# EAGLE board SilviaPID ver3.0 (EAGLE 6.0)
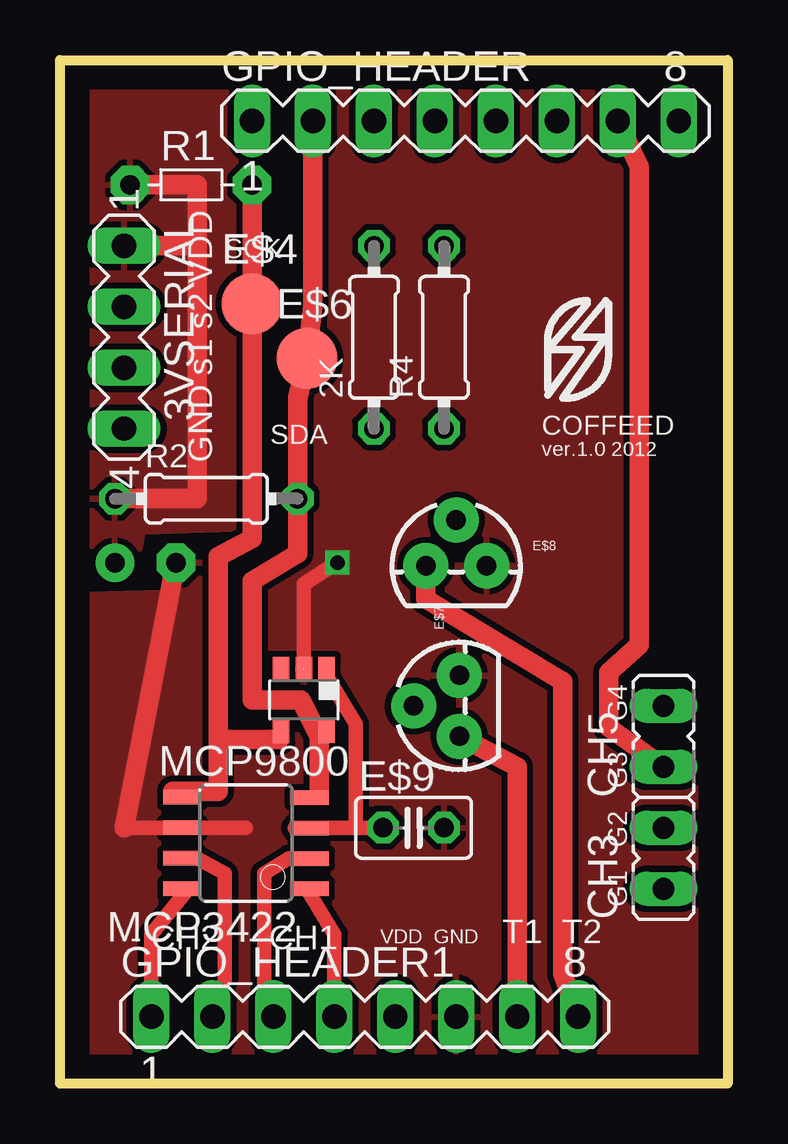
[diagram p0: board, top side]
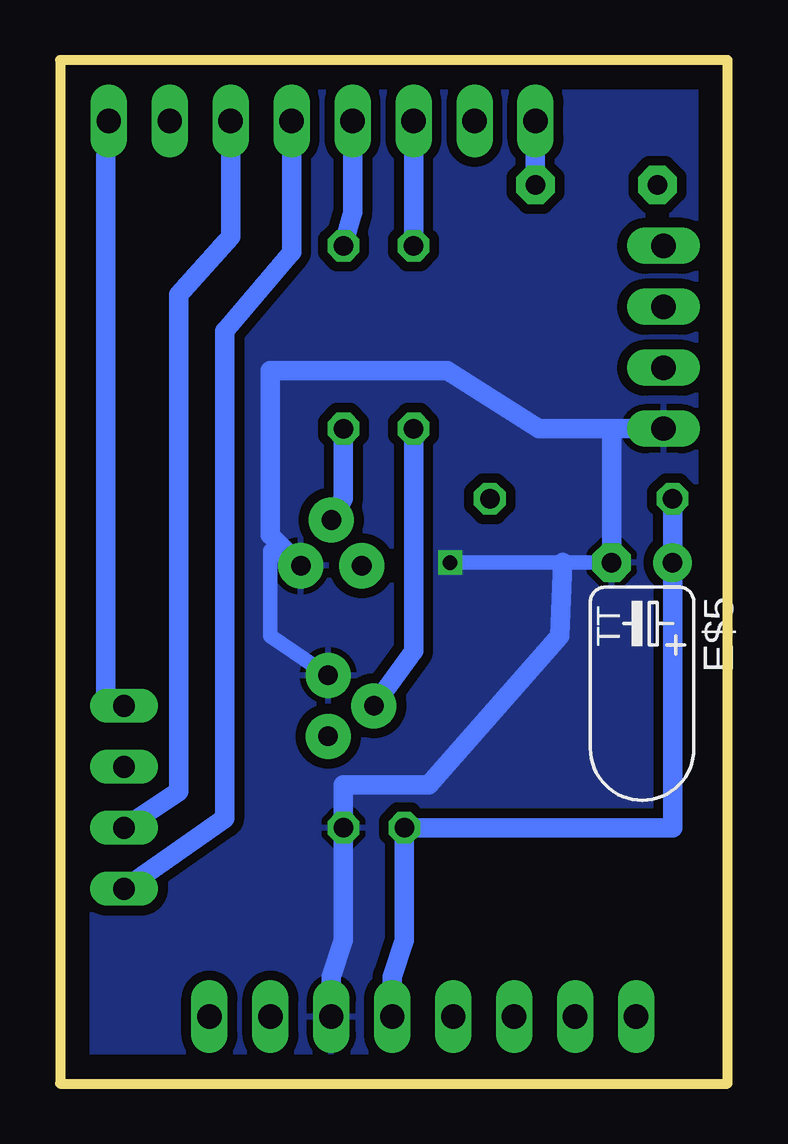
[diagram p1: board, bottom side, seen from below]

Size 27.81 x 42.67 mm. Coordinates in mm from the lower left corner, seen from the top.
Outline: 0,42.67 27.81,42.67 27.81,0 0,0 0,42.67
Copper layers (1*16): Top 0.035mm / dielectric 1.5mm / Bottom 0.035mm
Design rules: minimum track width 10mil, minimum drill 24mil, track to track 8mil, track to pad 8mil, pad to pad 8mil, via to via 8mil, smd to smd 8mil, copper to edge 40mil, drill to drill 8mil, minimum pad ring 10mil, minimum via ring 8mil, stop-mask expansion 4mil, vias tented up to drill 0mil, thermal gap 10mil

## Footprints (pad centres in the part's own frame; a part is rotated, then mirrored left to right if it is on the bottom)
0204/7 = drill 0.813 octagon: 1 -3.81,0; 2 3.81,0
MA04-1 = drill 1.016 long: 1 -3.81,0; 2 -1.27,0; 3 1.27,0; 4 3.81,0
JP1Y = drill 0.914 long: 1 0,-1.27; 2 0,1.27
B2,54 = smd 2.54 x 2.54: TP 0,0
TT2D4L = drill 0.813 pad 1.6: + -1.27,0 | drill 0.813 pad 1.6 octagon: - 1.27,0
TO-92 = drill 0.813 pad 1.88: 1 -1.27,0; 2 0,1.905; 3 1.27,0
C025-025X050 = drill 0.813 octagon: 1 -1.27,0; 2 1.27,0
MA08-1 = drill 1.016 long: 1 -8.89,0; 2 -6.35,0; 3 -3.81,0; 4 -1.27,0; 5 1.27,0; 6 3.81,0; 7 6.35,0; 8 8.89,0
8S1 = smd 0.6 x 1.6: 1 -1.905,-2.654; 2 -0.645,-2.654; 3 0.625,-2.654; 4 1.895,-2.654; 5 1.905,2.654; 6 0.635,2.654; 7 -0.635,2.654; 8 -1.905,2.654
DBV_R-PDSO-G5 = smd 0.69 x 0.99: 1 -0.95,-1.29; 2 0,-1.29; 3 0.95,-1.29; 4 0.95,1.3; 5 -0.95,1.3
R-5 = drill 0.813 pad 1.6 octagon: 1 -2.54,0; 2 2.54,0

## Placement (x,y rotation side)
2K  2k  [0204/7]  13.08,31.12 90 top
3VSERIAL  [MA04-1]  2.67,31.12 270 top
CH3  [JP1Y]  25.15,9.4 0 top
CH5  [JP1Y]  25.15,14.48 0 top
E$4  [B2,54]  8,32.51 0 top
E$5  [TT2D4L]  3.56,21.72 180 bottom
E$6  [B2,54]  10.29,30.23 0 top
E$7  2n3904  [TO-92]  16.64,15.75 90 top
E$8  2n3904  [TO-92]  16.51,21.59 0 top
E$9  [C025-025X050]  14.73,10.67 0 top
GPIO_HEADER  [MA08-1]  16.89,40.13 0 top
GPIO_HEADER1  [MA08-1]  12.7,2.79 0 top
MCP3422  [8S1]  7.75,10.03 90 top
MCP9800  [DBV_R-PDSO-G5]  10.16,16 180 top
R1  2k  [R-5]  5.46,37.46 0 top
R2  2k  [0204/7]  6.1,24.38 0 top
R4  2k  [0204/7]  16,31.12 90 top

## Library data of the parts
2K E$9 R2 R4 = rcl
3VSERIAL GPIO_HEADER GPIO_HEADER1 = con-lstb
CH3 CH5 = jumper
E$4 E$6 = testpad
E$5 = ref-packages-longpad
E$7 E$8 = SparkFun
MCP3422 = atmel
MCP9800 = 74xx-little-de
R1 = discrete

## Nets
GND: 3VSERIAL.4 E$5.- E$7.3 E$8.3 E$9.2 GPIO_HEADER1.6 MCP9800.2
S$1: 2K.2 GPIO_HEADER.3
S$2: GPIO_HEADER1.2
S$3: GPIO_HEADER.4 R4.2
S$4: GPIO_HEADER1.1
S$5: 2K.1 E$7.2
S$6: GPIO_HEADER1.4
S$7: E$8.2 R4.1
S$8: E$7.1 GPIO_HEADER1.7
S$9: E$8.1 GPIO_HEADER1.8
S$10: CH3.1 GPIO_HEADER.5
S$11: GPIO_HEADER1.3
S$12: CH5.1 GPIO_HEADER.7
S$13: CH5.2 GPIO_HEADER.8
S$15: CH3.2 GPIO_HEADER.6
S$16: E$4.TP GPIO_HEADER.1 R1.2
SDA: E$6.TP GPIO_HEADER.2 R2.2
VDD: 3VSERIAL.1 E$5.+ E$9.1 GPIO_HEADER1.5 R1.1 R2.1

## Tracks (layer width: path | path; a pad name or v marks a point on that pad's centre or on a via)
GND  (via drill 0.6)
  Top 0.61: 2.67,10.67 7.75,10.67 | v11.56,21.72 10.16,20.83 10.16,17.14
  Top 0.813: E$5.- 2.67,10.67
  Bottom 0.61: E$7.3 19.05,18.67 19.05,22.23 E$8.3 | v11.56,21.72 6.86,21.72 E$5.-
  Bottom 0.813: E$5.- 4.83,27.3 3VSERIAL.4 7.87,27.3 11.68,29.72 19.05,29.72 19.05,22.86 E$8.3 | 6.86,21.72 6.99,18.67 12.45,12.45 16,12.45 E$9.2 16,5.97 16.51,4.45 GPIO_HEADER1.6
  pour Bottom (isolate 0.406): -0.25,42.54 -0.25,-0.38 27.81,0 27.81,42.8
  pour Top (isolate 0.254): -0.51,20.32 -0.25,-0.38 27.81,-0.25 27.94,42.8 8.13,42.8 8.13,22.61 4.19,22.35 4.32,20.45
S$1
  Bottom 0.813: 2K.2 GPIO_HEADER.3
S$2
  Top 0.61: 5.71,9.4 6.86,8.76 6.86,4.32 GPIO_HEADER1.2
S$3
  Bottom 0.813: GPIO_HEADER.4 15.62,36.32 R4.2
S$4
  Top 0.61: GPIO_HEADER1.1 3.81,6.22 5.33,8.13
S$5
  Bottom 0.813: E$7.2 13.08,18.03 2K.1
S$6
  Top 0.61: GPIO_HEADER1.4 11.43,6.22 10.29,8.13
S$7
  Bottom 0.813: R4.1 16,24.38 E$8.2
S$8
  Top 0.813: E$7.1 19.05,13.21 GPIO_HEADER1.7
S$9
  Top 0.813: GPIO_HEADER1.8 20.96,4.57 20.96,16.76 15.24,20.19 E$8.1
S$10
  Bottom 0.813: GPIO_HEADER.5 18.16,34.67 20.96,31.37 20.96,11.05 CH3.1
S$11
  Top 0.61: 9.52,9.4 8.51,8.76 8.51,4.19 GPIO_HEADER1.3
S$12
  Top 0.813: CH5.1 22.86,14.86 22.86,17.14 24.13,18.29 24.13,38.23 GPIO_HEADER.7
S$13
  Bottom 0.813: GPIO_HEADER.8 25.91,38.61 25.91,16.26 CH5.2
S$15
  Bottom 0.813: CH3.2 22.86,12.19 22.86,32.89 20.7,35.31 GPIO_HEADER.6
S$16
  Top 0.813: 9.14,14.35 6.6,14.35 | 6.6,14.35 6.6,21.97 8,22.73 E$4.TP R1.2 | 6.6,14.35 6.6,12.19 4.7,12.19
  Bottom 0.813: R1.2 GPIO_HEADER.1
SDA
  Top 0.813: GPIO_HEADER.2 10.54,32.38 E$6.TP 9.91,28.57 R2.2 9.91,22.1 8,20.96 8,16 10.03,16 10.8,14.48 10.8,12.32
VDD
  Top 0.61: 11.18,16.89 12.32,14.99 12.32,10.67 | E$9.1 12.32,10.67 | 12.32,10.67 9.78,10.67
  Top 0.813: 3VSERIAL.1 5.71,34.92 | 5.71,34.92 5.71,24.38 R2.1 | R1.1 5.71,37.46 5.71,34.92
  Bottom 0.813: R2.1 E$5.+ 2.29,10.67 E$9.1 13.46,5.97 13.97,4.45 GPIO_HEADER1.5
  pour Top (isolate 0.254): 8,42.67 7.37,23.11 3.43,22.99 3.3,22.23 -0.38,22.1 -0.38,42.67

## Text on the board
_tsilk: SCK | COFFEED | SDA | ver.1.0 2012 | GND s1 s2 VDD | G3 G4 | G1 G2 | - CH2 - CH1 | VDD GND | T1 T2